# EAGLE board axiom_beta_plugin_module_1xHDMI_in_v0.1.f594beab (EAGLE 7.0.0)
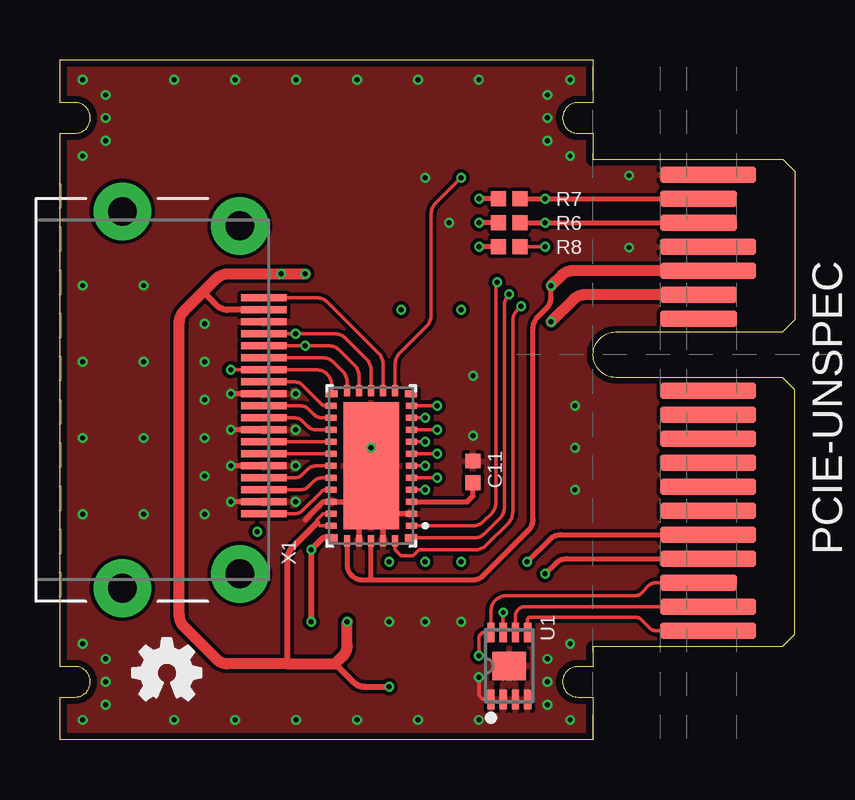
[diagram p0: board, top side]
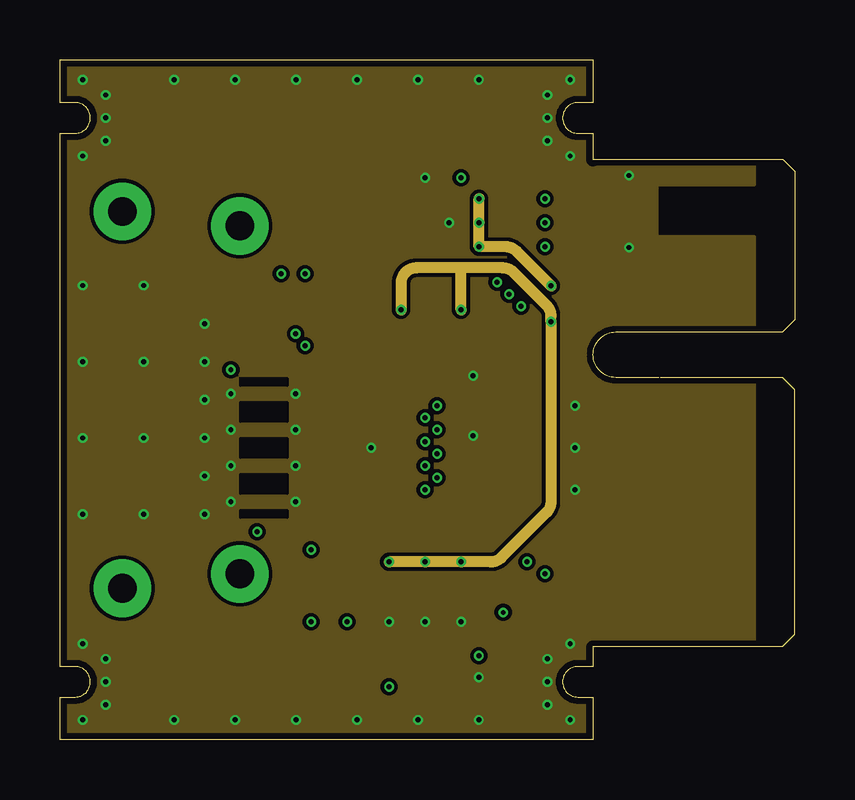
[diagram p1: board, inner layer Route2]
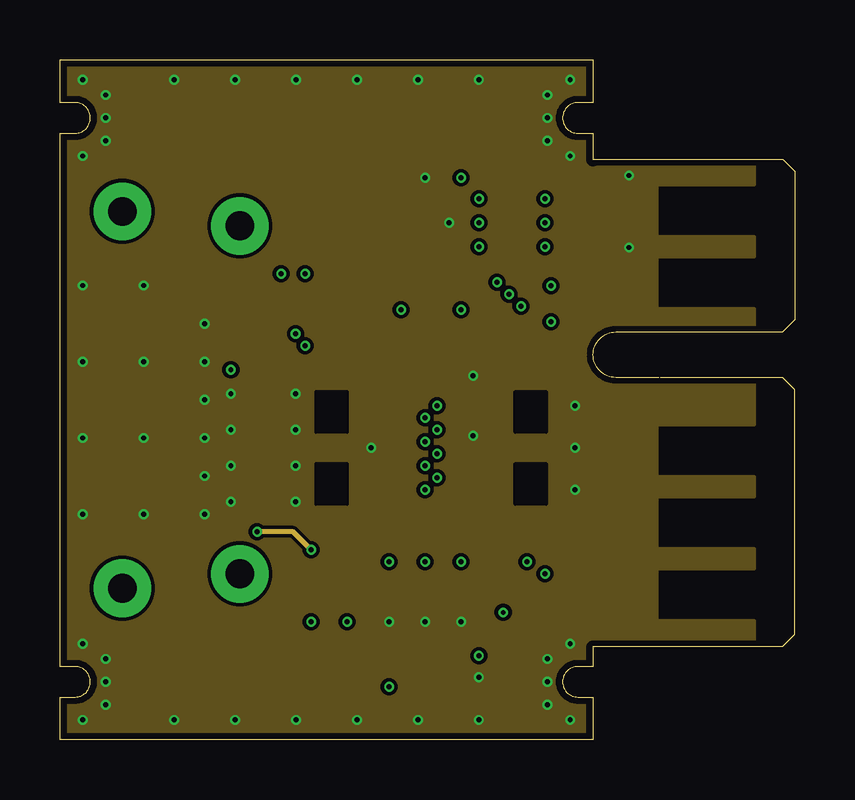
[diagram p2: board, inner layer Route15]
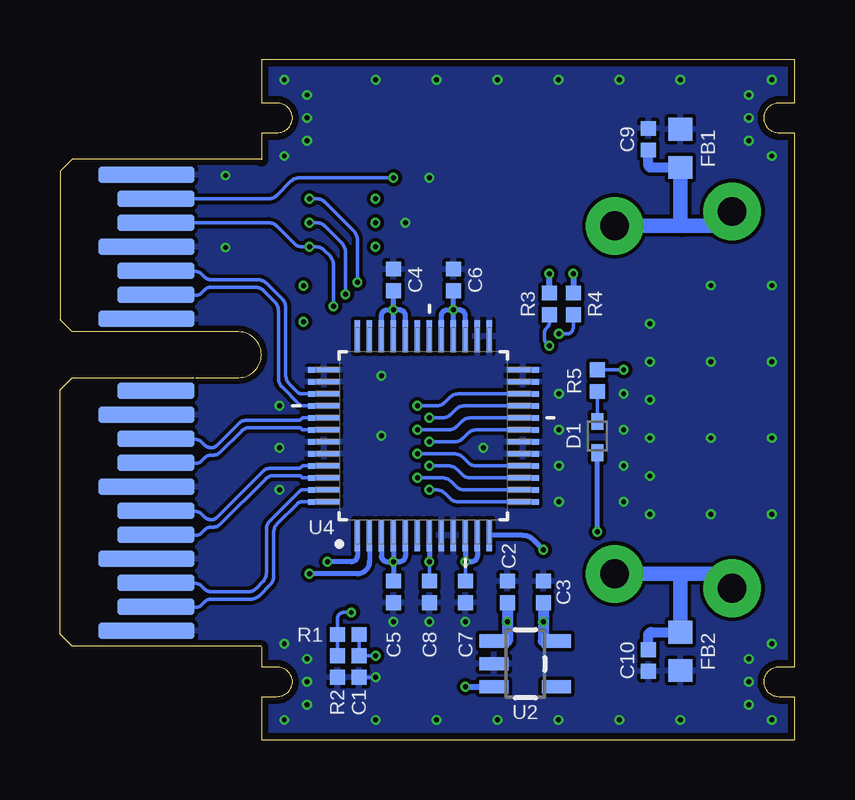
[diagram p3: board, bottom side, seen from below]

Size 30.62 x 28.32 mm. Coordinates in mm from the lower left corner, seen from the top.
Outline: 22.23,24.16 22.23,25.27 21.59,25.27 arc-90 20.96,25.91 arc-90 21.59,26.54 22.23,26.54 22.23,28.32 0,28.32 0,26.54 0.64,26.54 arc-90 1.27,25.91 arc-90 0.64,25.27 0,25.27 0,3.05 0.64,3.05 arc-90 1.27,2.41 arc-90 0.64,1.78 0,1.78 0,0 22.23,0 22.23,1.78 21.59,1.78 arc-90 20.96,2.41 arc-90 21.59,3.05 22.23,3.05 22.23,3.86
Copper layers (1*2*15*16): Top 0.035559375mm / dielectric 0.17018125mm / Route2 0.01778125mm / dielectric 47mil / Route15 0.01778125mm / dielectric 0.17018125mm / Bottom 0.035559375mm
Design rules "OSHPark-4layer-tuned *": minimum track width 5mil, minimum drill 8mil, track to track 6mil, track to pad 5mil, pad to pad 5mil, via to via 5mil, smd to smd 5mil, copper to edge 10mil, drill to drill 6mil, minimum pad ring 4mil, minimum via ring 4mil, stop-mask expansion 2mil, vias tented up to drill 15mil, thermal gap 6mil
Net classes: 0 default: width 0.152 mm, drill 0.203 mm; 1 power: width 0.152 mm, drill 0.203 mm
tKeepout: area -1,24.3 to 2.2,27.5; area -1,0.8 to 2.2,4; area 20,0.8 to 23.2,4; area 20,24.3 to 23.2,27.5
bKeepout: area -1,24.3 to 2.2,27.5; area -1,0.8 to 2.2,4; area 20,0.8 to 23.2,4; area 20,24.3 to 23.2,27.5

## Footprints (pad centres in the part's own frame; a part is rotated, then mirrored left to right if it is on the bottom)
0402-B = smd 0.62 x 0.62: 1 -0.45,0; 2 0.45,0
SOD523 = smd 0.7 x 0.5: A 0.7,0; C -0.6,0
0603-B = smd 0.95 x 1: 1 -0.8,0; 2 0.8,0
PCIE-36-AXIOM = smd 0.7 x 4 bottom: A1 -11.5,3.6; A4 -8.5,3.6; A7 -5.5,3.6; A10 -2.5,3.6; A12 1.5,3.6; A15 4.5,3.6; A18 7.5,3.6 | smd 0.7 x 3.2 bottom: A2 -10.5,4; A3 -9.5,4; A5 -7.5,4; A6 -6.5,4; A8 -4.5,4; A9 -3.5,4; A11 -1.5,4; A13 2.5,4; A14 3.5,4; A16 5.5,4; A17 6.5,4 | smd 0.7 x 4: B1 -11.5,3.6; B2 -10.5,3.6; B4 -8.5,3.6; B5 -7.5,3.6; B6 -6.5,3.6; B7 -5.5,3.6; B8 -4.5,3.6; B9 -3.5,3.6; B10 -2.5,3.6; B11 -1.5,3.6; B14 3.5,3.6; B15 4.5,3.6; B18 7.5,3.6 | smd 0.7 x 3.2: B3 -9.5,4; B12 1.5,4; B13 2.5,4; B16 5.5,4; B17 6.5,4
DFN200X300X100-9N = smd 0.813 x 0.305: 1 -1.397,0.762; 2 -1.397,0.254; 3 -1.397,-0.254; 4 -1.397,-0.762; 5 1.397,-0.762; 6 1.397,-0.254; 7 1.397,0.254; 8 1.397,0.762 | smd 1.194 x 1.397: EP 0,0
SOT23-5 = smd 0.55 x 1.2: 1 -0.95,-1.3; 2 0,-1.3; 3 0.95,-1.3; 4 0.95,1.3; 5 -0.95,1.3
QFN50P650L90W-25N = smd 0.25 x 0.45: 1 -2.5,-1.675; 2 -2,-1.675; 3 -1.5,-1.675; 4 -1,-1.675; 5 -0.5,-1.675; 6 0,-1.675; 7 0.5,-1.675; 8 1,-1.675; 9 1.5,-1.675; 10 2,-1.675; 11 2.5,-1.675; 19 2.5,1.675; 20 2,1.675; 21 1.5,1.675; 22 1,1.675; 23 0.5,1.675; 24 0,1.675; 25 -0.5,1.675; 26 -1,1.675; 27 -1.5,1.675; 28 -2,1.675; 29 -2.5,1.675 | smd 0.3 x 0.5: 12 3.005,-1.65; 18 3.005,1.65; 30 -3.005,1.65; 36 -3.005,-1.65 | smd 0.45 x 0.25: 13 3.125,-1; 14 3.125,-0.5; 15 3.125,0; 16 3.125,0.5; 17 3.125,1; 31 -3.125,1; 32 -3.125,0.5; 33 -3.125,0; 34 -3.125,-0.5; 35 -3.125,-1 | smd 5.3 x 2.3: EP 0,0
QFP50P900X900X160-48N = smd 1.321 x 0.229: 1 -4.15,2.75; 2 -4.15,2.25; 3 -4.15,1.75; 4 -4.15,1.25; 5 -4.15,0.75; 6 -4.15,0.25; 7 -4.15,-0.25; 8 -4.15,-0.75; 9 -4.15,-1.25; 10 -4.15,-1.75; 11 -4.15,-2.25; 12 -4.15,-2.75; 25 4.15,-2.75; 26 4.15,-2.25; 27 4.15,-1.75; 28 4.15,-1.25; 29 4.15,-0.75; 30 4.15,-0.25; 31 4.15,0.25; 32 4.15,0.75; 33 4.15,1.25; 34 4.15,1.75; 35 4.15,2.25; 36 4.15,2.75 | smd 0.229 x 1.321: 13 -2.75,-4.15; 14 -2.25,-4.15; 15 -1.75,-4.15; 16 -1.25,-4.15; 17 -0.75,-4.15; 18 -0.25,-4.15; 19 0.25,-4.15; 20 0.75,-4.15; 21 1.25,-4.15; 22 1.75,-4.15; 23 2.25,-4.15; 24 2.75,-4.15; 37 2.75,4.15; 38 2.25,4.15; 39 1.75,4.15; 40 1.25,4.15; 41 0.75,4.15; 42 0.25,4.15; 43 -0.25,4.15; 44 -0.75,4.15; 45 -1.25,4.15; 46 -1.75,4.15; 47 -2.25,4.15; 48 -2.75,4.15
10029449-X01XLF = smd 0.3 x 1.9: 1 4.75,8.5; 2 4.25,8.5; 3 3.75,8.5; 4 3.25,8.5; 5 2.75,8.5; 6 2.25,8.5; 7 1.75,8.5; 8 1.25,8.5; 9 0.75,8.5; 10 0.25,8.5; 11 -0.25,8.5; 12 -0.75,8.5; 13 -1.25,8.5; 14 -1.75,8.5; 15 -2.25,8.5; 16 -2.75,8.5; 17 -3.25,8.5; 18 -3.75,8.5; 19 -4.25,8.5 | drill 1.2 pad 2.4: Z1 -7.25,7.5; Z2 -7.85,2.6; Z3 7.85,2.6; Z4 7.25,7.5

## Placement (x,y rotation side)
C1  100n  [0402-B]  18.16,3.05 270 bottom
C2  1u  [0402-B]  11.98,6.16 90 bottom
C3  1u  [0402-B]  10.48,6.16 90 bottom
C4  100n  [0402-B]  16.73,19.16 90 bottom
C5  100n  [0402-B]  16.73,6.16 270 bottom
C6  10n  [0402-B]  14.23,19.16 90 bottom
C7  10n  [0402-B]  13.73,6.16 270 bottom
C8  10n  [0402-B]  15.23,6.16 270 bottom
C9  10n  [0402-B]  6.1,25.02 90 bottom
C10  10n  [0402-B]  6.1,3.3 270 bottom
C11  10n  [0402-B]  17.23,11.16 90 top
D1  [SOD523]  8.23,12.66 270 bottom
FB1  [0603-B]  4.76,24.64 90 bottom
FB2  [0603-B]  4.76,3.68 270 bottom
LOGO2  OSHW_LOGO_FILLX0100-NT  [OSHW_FILLX100_NOTEXT]  3.04,1.66 0 top
PCIE-UNSPEC  PCIE-36-AXIOM  [PCIE-36-AXIOM]  30.62,16.04 90 top  (not fitted)
R1  10k  [0402-B]  18.61,4.38 180 bottom
R2  1k  [0402-B]  19.05,3.05 270 bottom
R3  [0402-B]  10.23,18.16 270 bottom
R4  [0402-B]  9.23,18.16 270 bottom
R5  [0402-B]  8.23,14.96 90 bottom
R6  [0402-B]  18.73,21.54 0 top
R7  [0402-B]  18.73,22.54 0 top
R8  [0402-B]  18.73,20.54 0 top
U1  BR24G04NUX  [DFN200X300X100-9N]  18.73,3.08 90 top
U2  AP7331-FIXEDSOT23-5  [SOT23-5]  11.23,3.16 270 bottom
U3  HDMI2C2-14HD  [QFN50P650L90W-25N]  12.98,11.41 90 top
U4  DS90LV004  [QFP50P900X900X160-48N]  15.48,12.66 90 bottom
U$  AXIOM_LOGO459X70  [AXIOM_LOGO_459X70]  4.13,24.96 0 top
X1  HDMI-10029449  [10029449-X01XLF]  0,14.16 270 top

## Library data of the parts
C1-C11 FB1 FB2 R1-R8 = generic-rcl
D1 = diode
LOGO2 = ohw-logo
PCIE-UNSPEC = PCIe
U1 = eeprom
U2 = ldo
U3 = hdmi2c2-14hd
U4 = ds90lv004
U$ = logos_apertus_axiom
X1 = hdmi

## Nets
3V3: C4.1 C5.1 C6.1 C7.1 C8.1 PCIE-UNSPEC.B13 U4.3 U4.4 U4.5 U4.7 U4.10 U4.11 U4.27 U4.28 U4.29 U4.32 U4.33 U4.34
5V_IN: C2.1 R3.1 R4.1 U2.1 U2.3 U3.28 U3.29 X1.18
!OE!: PCIE-UNSPEC.B10
CEC: PCIE-UNSPEC.A16 R8.2 U3.35
CK+: U3.20 X1.10
CK-: U3.19 X1.12
D0+: U3.22 X1.7
D0-: U3.21 X1.9
D1+: U3.24 X1.4
D1-: U3.23 X1.6
D2+: U3.26 X1.1
D2-: U3.25 X1.3
DDC_EN: PCIE-UNSPEC.B9
DDC_SCL: PCIE-UNSPEC.B16 R6.2 U3.36
DDC_SDA: PCIE-UNSPEC.B17 R7.2 U3.1
DDET: PCIE-UNSPEC.B7
EN: PCIE-UNSPEC.B11
EQ1: PCIE-UNSPEC.B8
GND: C1.2 C2.2 C3.2 C4.2 C5.2 C6.2 C7.2 C8.2 C9.2 C10.2 C11.2 FB1.2 FB2.2 PCIE-UNSPEC.A1 PCIE-UNSPEC.A4 PCIE-UNSPEC.A7 PCIE-UNSPEC.A10 PCIE-UNSPEC.A12 PCIE-UNSPEC.A15 PCIE-UNSPEC.A18 PCIE-UNSPEC.B15 PCIE-UNSPEC.B18 R2.2 U1.1 U1.2 U1.3 U1.4 U1.EP U2.2 U3.2 U3.27 U3.32 U3.34 U3.EP U4.8 U4.9 U4.17 U4.18 U4.23 U4.24 U4.25 U4.26 U4.37 U4.38 U4.43 U4.44 X1.2 X1.5 X1.8 X1.11 X1.17
HEAC+: U3.12
HPD: PCIE-UNSPEC.A17 U3.13
I2C_V: C1.1 PCIE-UNSPEC.B3 R1.1 U1.8
IHP: PCIE-UNSPEC.B6
IN0+: U3.4 U4.13
IN0-: U3.5 U4.14
IN1+: U3.6 U4.15
IN1-: U3.7 U4.16
IN2+: U3.8 U4.19
IN2-: U3.9 U4.20
IN3+: U3.10 U4.21
IN3-: U3.11 U4.22
LVDS_0_N: PCIE-UNSPEC.A3 U4.47
LVDS_0_P: PCIE-UNSPEC.A2 U4.48
LVDS_1_N [power]: PCIE-UNSPEC.A6 U4.45
LVDS_1_P [power]: PCIE-UNSPEC.A5 U4.46
LVDS_2_N [power]: PCIE-UNSPEC.A9 U4.41
LVDS_2_P [power]: PCIE-UNSPEC.A8 U4.42
LVDS_3_N [power]: PCIE-UNSPEC.A14 U4.39
LVDS_3_P [power]: PCIE-UNSPEC.A13 U4.40
N$1: R3.2 U3.16 X1.15
N$2: R4.2 U3.15 X1.16
N$3: R5.2 U3.18 X1.13
N$4: U3.17 X1.14
N$5: U3.14 X1.19
N$6: C9.1 FB1.1 X1.Z1 X1.Z2
N$12: R1.2 R2.1 U1.7
N$15: C10.1 FB2.1 X1.Z3 X1.Z4
N$17: D1.C R5.1
N$19: C11.1 U3.3
N$209: PCIE-UNSPEC.A11
PCIE_5V: PCIE-UNSPEC.B12
PEM0: PCIE-UNSPEC.B5 U4.1
PEM1: PCIE-UNSPEC.B4 U4.2
SCL: PCIE-UNSPEC.B2 U1.6
SDA: PCIE-UNSPEC.B1 U1.5
VDD_CEC: C3.1 D1.A U2.5 U3.30 U4.12
VDD_IC: PCIE-UNSPEC.B14 R6.1 R7.1 R8.1 U3.31 U3.33

## Tracks (layer width: path | path; a pad name or v marks a point on that pad's centre or on a via)
3V3  (via drill 0.2)
  Top 0.457: PCIE-UNSPEC.B13 21.87,18.54 arc45 21.42,18.35 v20.48,17.41
  Route2 0.457: 16.73,19.66 18.46,19.66 arc-45 18.91,19.47 20.29,18.1 arc-45 20.48,17.65 v20.48,17.41 20.48,9.92 arc-45 20.29,9.47 18.41,7.6 arc-45 17.96,7.41 v16.73,7.41 v15.23,7.41 v13.73,7.41 | 16.73,19.66 14.86,19.66 arc90 14.23,19.03 v14.23,17.91 | v16.73,17.91 16.73,19.66
  Bottom 0.152: C7.1 v13.73,7.41 | C8.1 v15.23,7.41
  Bottom 0.203: U4.11 13.23,7.66 arc90 13.48,7.41 v13.73,7.41 U4.10 | U4.5 16.23,7.66 arc90 16.48,7.41 v16.73,7.41 | U4.3 17.23,7.66 arc-90 16.97,7.41 v16.73,7.41 | U4.7 v15.23,7.41 | U4.4 v16.73,7.41 | U4.34 17.23,17.66 arc90 16.97,17.91 v16.73,17.91 | U4.32 16.23,17.66 arc-90 16.48,17.91 v16.73,17.91 | U4.27 13.73,17.66 arc-90 13.98,17.91 v14.23,17.91 | U4.28 v14.23,17.91 | U4.29 14.73,17.66 arc90 14.47,17.91 v14.23,17.91 | U4.33 v16.73,17.91 | v16.73,7.41 C5.1 | v14.23,17.91 C6.1 | v16.73,17.91 C4.1
5V_IN  (via drill 0.2)
  Top 0.152: U3.28 10.98,9.41 10.73,9.16 10.73,9.04 10.85,8.91 U3.29
  Top 0.254: 10.73,9.04 9.66,7.97 arc45 9.48,7.52 9.48,3.16 | 11.48,3.16 12.24,2.4 arc45 12.69,2.21 v13.73,2.21 | X1.18 6.99,17.91 arc-45 6.54,18.1 5.98,18.66
  Top 0.457: v11.98,4.91 11.98,3.92 arc-45 11.79,3.47 11.48,3.16 9.48,3.16 6.99,3.16 arc-45 6.54,3.35 5.16,4.72 arc-45 4.98,5.17 4.98,17.4 arc-45 5.16,17.85 5.98,18.66 6.54,19.22 arc-45 6.99,19.41 v9.23,19.41 v10.23,19.41
  Bottom 0.254: v13.73,2.21 U2.3 | R3.1 v10.23,19.41 | v9.23,19.41 R4.1
  Bottom 0.457: C2.1 v11.98,4.91 11.98,4.11 U2.1
CEC  (via drill 0.2)
  Top 0.152: U3.35 13.98,7.91 14.23,7.66 14.73,7.66 14.98,7.91 17.31,7.91 arc45 17.76,8.1 18.69,9.02 arc45 18.88,9.47 18.88,17.45 arc-45 19.06,17.9 v19.23,18.06 | R8.2 v20.23,20.54
  Bottom 0.152: v19.23,18.06 19.23,19.8 arc-45 19.37,20.16 19.61,20.39 arc-45 19.97,20.54 v20.23,20.54 20.52,20.54 arc45 20.87,20.69 21.58,21.39 arc-45 21.94,21.54 PCIE-UNSPEC.A16
CK+
  Top 0.152: X1.10 10.02,13.91 arc-45 10.37,13.76 10.58,13.56 arc45 10.94,13.41 U3.20
CK-
  Top 0.152: X1.12 9.77,14.91 arc-45 10.12,14.76 10.9,13.98 arc45 11.08,13.91 U3.19
D0+
  Top 0.152: X1.7 U3.22
D0-
  Top 0.152: X1.9 9.77,13.41 arc-45 10.12,13.26 10.33,13.06 arc45 10.69,12.91 U3.21
D1+
  Top 0.152: X1.4 9.77,10.91 arc45 10.12,11.06 10.33,11.26 arc-45 10.69,11.41 U3.24
D1-
  Top 0.152: X1.6 U3.23
D2+
  Top 0.152: X1.1 9.77,9.41 arc45 10.12,9.56 10.9,10.34 arc-45 11.08,10.41 U3.26
D2-
  Top 0.152: X1.3 10.02,10.41 arc45 10.37,10.56 10.58,10.76 arc-45 10.94,10.91 U3.25
DDC_SCL  (via drill 0.2)
  Top 0.152: U3.36 17.26,8.41 arc45 17.71,8.59 18.34,9.22 arc45 18.53,9.67 18.53,18.1 arc-45 18.71,18.55 v18.73,18.56
  Top 0.203: R6.2 v20.23,21.54 PCIE-UNSPEC.B16
  Bottom 0.152: v18.73,18.56 18.73,20.33 arc-45 18.87,20.69 19.58,21.39 arc-45 19.94,21.54 v20.23,21.54
DDC_SDA  (via drill 0.2)
  Top 0.152: U3.1 17.21,8.91 arc45 17.66,9.1 17.99,9.42 arc45 18.18,9.87 18.18,18.94 arc-45 v18.23,19.06
  Top 0.203: R7.2 v20.23,22.54 PCIE-UNSPEC.B17
  Bottom 0.152: v18.23,19.06 18.23,20.83 arc-45 18.37,21.19 19.58,22.39 arc-45 19.94,22.54 v20.23,22.54
GND  (via drill 0.2)
  Top 0.152: U1.1 17.72,1.68 arc-90 17.46,1.93 v17.46,2.6
  Top 0.203: X1.2 v7.13,9.91 | X1.5 v7.13,11.41 | X1.8 v7.13,12.91 | X1.11 v7.13,14.41 | 10.23,9.16 10.98,9.91 U3.27 12.48,9.91 U3.32 | U3.2 13.48,9.41 U3.34
  Bottom 0.152: v17.46,2.6 C1.2
  other vias: 0.95,27.5 21.27,27.5 21.27,0.83 0.95,0.83 4.76,27.5 17.46,27.5 4.76,0.83 0.95,4 0.95,24.32 1.91,24.96 21.27,24.32 17.46,0.83 21.27,4 7.3,27.5 9.84,27.5 12.38,27.5 0.95,12.57 0.95,15.75 0.95,18.92 0.95,9.4 1.91,26.86 20.32,24.96 20.32,26.86 1.91,1.46 1.91,3.37 20.32,3.37 20.32,1.46 9.84,0.83 12.38,0.83 7.3,0.83 14.92,0.83 20.32,25.91 1.91,25.91 1.91,2.41 20.32,2.41 3.49,18.92 3.49,15.75 3.49,12.57 3.49,9.4 6.03,15.75 6.03,12.57 6.03,9.4 6.03,14.16 6.03,10.99 6.03,17.34 23.73,23.51 23.73,20.51 14.92,27.5 17.23,15.16 17.23,12.66 9.83,14.41 9.83,12.91 9.83,11.41 9.83,9.91 12.98,12.16 21.48,10.41 21.48,12.16 21.48,13.91 13.73,4.91 15.23,4.91 16.73,4.91 15.23,23.41 16.23,21.54
  pour Bottom (isolate 0.127): 0,28.45 22.23,28.45 22.23,24.32 25.4,24.32 25.4,3.75 22.23,3.75 22.23,-0.13 0,-0.13
  pour Top (isolate 0.127): 0,28.45 22.23,28.45 22.23,24.32 25.4,24.32 25.4,3.75 22.23,3.75 22.23,-0.13 0,-0.13
  pour Route2 (isolate 0.127, rank 3): 0,28.45 22.23,28.45 22.23,24.32 28.96,24.32 28.96,23.12 24.89,23.12 24.89,20.96 28.96,20.96 28.96,3.75 22.23,3.75 22.23,-0.13 0,-0.13
  pour Route15 (isolate 0.127, rank 3): 0,28.45 22.23,28.45 22.23,24.32 28.96,24.32 28.96,23.12 24.89,23.12 24.89,20.96 28.96,20.96 28.96,20.12 24.89,20.12 24.89,17.96 28.96,17.96 28.96,13.12 24.89,13.12 24.89,10.96 28.96,10.96 28.96,10.12 24.89,10.12 24.89,7.96 28.96,7.96 28.96,7.12 24.89,7.12 24.89,4.96 28.96,4.96 28.96,3.75 22.23,3.75 22.23,-0.13 0,-0.13
  cutout Route2: 9.48,9.26 7.53,9.26 7.53,9.56 9.48,9.56
  cutout Route2: 9.48,14.76 7.53,14.76 7.53,15.06 9.48,15.06
  cutout Route2: 9.48,13.26 7.53,13.26 7.53,14.06 9.48,14.06
  cutout Route2: 9.48,11.76 7.53,11.76 7.53,12.56 9.48,12.56
  cutout Route2: 9.48,10.26 7.53,10.26 7.53,11.06 9.48,11.06
  cutout Route15: 11.98,12.81 10.68,12.81 10.68,14.51 11.98,14.51
  cutout Route15: 11.98,9.81 10.68,9.81 10.68,11.51 11.98,11.51
  cutout Route15: 20.28,12.81 18.98,12.81 18.98,14.51 20.28,14.51
  cutout Route15: 20.28,9.81 18.98,9.81 18.98,11.51 20.28,11.51
HPD  (via drill 0.2)
  Top 0.152: U3.13 13.98,15.65 arc-45 14.16,16.1 15.29,17.22 arc45 15.48,17.67 15.48,21.9 arc-45 15.66,22.35 v16.73,23.41
  Bottom 0.152: v16.73,23.41 20.64,23.41 arc-45 21,23.26 21.58,22.69 arc45 21.94,22.54 PCIE-UNSPEC.A17
I2C_V  (via drill 0.2)
  Top 0.152: v17.46,3.5 17.46,4.22 arc-90 17.72,4.48 U1.8 17.97,5.36 arc-90 18.61,6 23.97,6 arc45 24.24,6.11 24.56,6.43 arc-45 24.83,6.54 PCIE-UNSPEC.B3
  Bottom 0.152: v17.46,3.5 C1.1 R1.1
IN0+  (via drill 0.2)
  Top 0.152: v15.23,10.41 U3.4
  Bottom 0.152: U4.13 14.02,9.91 arc45 14.37,10.06 14.58,10.26 arc-45 14.94,10.41 v15.23,10.41 14.98,10.41
IN0-  (via drill 0.2)
  Top 0.152: v15.73,10.91 U3.5
  Bottom 0.152: U4.14 13.77,10.41 arc45 14.12,10.56 14.33,10.76 arc-45 14.69,10.91 14.98,10.91 15.23,10.91 v15.73,10.91
IN1+  (via drill 0.2)
  Top 0.152: v15.23,11.41 U3.6
  Bottom 0.152: U4.15 13.52,10.91 arc45 13.87,11.06 14.08,11.26 arc-45 14.44,11.41 v15.23,11.41
IN1-  (via drill 0.2)
  Top 0.152: v15.73,11.91 U3.7
  Bottom 0.152: U4.16 13.27,11.41 arc45 13.62,11.56 13.83,11.76 arc-45 14.19,11.91 v15.73,11.91
IN2+  (via drill 0.2)
  Top 0.152: v15.23,12.41 U3.8
  Bottom 0.152: U4.19 13.27,12.91 arc-45 13.62,12.76 13.83,12.56 arc45 14.19,12.41 v15.23,12.41
IN2-  (via drill 0.2)
  Top 0.152: v15.73,12.91 U3.9
  Bottom 0.152: U4.20 13.52,13.41 arc-45 13.87,13.26 14.08,13.06 arc45 14.44,12.91 v15.73,12.91
IN3+  (via drill 0.2)
  Top 0.152: v15.23,13.41 U3.10
  Bottom 0.152: U4.21 13.77,13.91 arc-45 14.12,13.76 14.33,13.56 arc45 14.69,13.41 v15.23,13.41
IN3-  (via drill 0.2)
  Top 0.152: v15.73,13.91 U3.11
  Bottom 0.152: U4.22 14.02,14.41 arc-45 14.37,14.26 14.58,14.06 arc45 14.94,13.91 15.15,13.91 15.23,13.91 v15.73,13.91
LVDS_0_N
  Bottom 0.152: PCIE-UNSPEC.A3 24.98,6.51 arc45 24.71,6.4 24.59,6.27 arc-45 24.32,6.16 22.79,6.16 arc-45 22.43,6.31 22.17,6.57 arc-45 22.02,6.93 22.02,8.76 arc45 21.87,9.12 20.66,10.34 arc45 20.48,10.41 U4.47
LVDS_0_P
  Bottom 0.152: PCIE-UNSPEC.A2 24.98,5.51 arc-45 24.71,5.62 24.59,5.75 arc45 24.32,5.86 22.67,5.86 arc-45 22.31,6.01 21.86,6.45 arc-45 21.71,6.81 21.71,8.64 arc45 21.57,9 20.73,9.84 arc45 20.55,9.91 U4.48
LVDS_1_N
  Bottom 0.152: PCIE-UNSPEC.A6 24.98,9.51 arc45 24.71,9.4 24.59,9.27 arc-45 24.32,9.16 24.32,9.16 arc-45 24.1,9.25 22.19,11.16 arc45 21.83,11.31 20.67,11.31 arc-45 20.58,11.35 20.56,11.37 arc45 20.47,11.41 U4.45
LVDS_1_P
  Bottom 0.152: PCIE-UNSPEC.A5 24.98,8.51 arc-45 24.71,8.62 24.59,8.75 arc45 24.32,8.86 24.22,8.86 arc-45 23.95,8.97 22.06,10.86 arc45 21.7,11.01 20.67,11.01 arc45 20.58,10.97 20.56,10.95 arc-45 20.47,10.91 U4.46
LVDS_2_N
  Bottom 0.152: PCIE-UNSPEC.A9 24.98,12.51 arc45 24.71,12.4 24.59,12.27 arc-45 24.32,12.16 arc-45 24.1,12.25 23.19,13.16 arc45 22.83,13.31 20.67,13.31 arc-45 20.58,13.35 20.56,13.37 arc45 20.47,13.41 U4.41
LVDS_2_P
  Bottom 0.152: PCIE-UNSPEC.A8 24.98,11.51 arc-45 24.71,11.62 24.59,11.75 arc45 24.32,11.86 24.22,11.86 arc-45 23.95,11.97 23.06,12.86 arc45 22.7,13.01 20.67,13.01 arc45 20.58,12.97 20.56,12.95 arc-45 20.47,12.91 U4.42
LVDS_3_N
  Bottom 0.152: PCIE-UNSPEC.A14 24.98,19.51 arc45 24.71,19.4 24.59,19.27 arc-45 24.32,19.16 22.36,19.16 arc45 22.01,19.01 21.36,18.37 arc45 21.21,18.01 21.21,15.18 arc-45 21.07,14.82 20.73,14.48 arc-45 20.55,14.41 U4.39
LVDS_3_P
  Bottom 0.152: PCIE-UNSPEC.A13 24.98,18.51 arc-45 24.71,18.62 24.59,18.75 arc45 24.32,18.86 22.49,18.86 arc45 22.13,18.71 21.67,18.25 arc45 21.52,17.89 21.52,15.06 arc-45 21.37,14.7 20.66,13.98 arc-45 20.48,13.91 U4.40
N$1  (via drill 0.2)
  Top 0.152: X1.15 v10.23,16.41 11.21,16.41 arc-45 11.66,16.22 12.29,15.6 arc-45 12.48,15.15 U3.16
  Bottom 0.152: R3.2 10.23,17.37 arc45 10.3,17.19 10.35,17.13 arc-45 10.43,16.96 10.43,16.72 arc-45 10.35,16.54 v10.23,16.41
N$2  (via drill 0.2)
  Top 0.152: X1.16 v9.83,16.91 11.46,16.91 arc-45 11.91,16.72 12.79,15.85 arc-45 12.98,15.4 U3.15
  Bottom 0.152: R4.2 9.23,17.16 arc90 9.48,16.91 v9.83,16.91
N$3  (via drill 0.2)
  Top 0.152: U3.18 11.33,14.78 arc90 10.69,15.41 X1.13 v7.13,15.41
  Bottom 0.152: v7.13,15.41 R5.2
N$4
  Top 0.152: X1.14 10.96,15.91 arc-45 11.41,15.72 11.79,15.35 arc-45 11.98,14.9 U3.17
N$5
  Top 0.152: X1.19 10.71,18.41 arc-45 11.16,18.22 13.29,16.1 arc-45 13.48,15.65 U3.14
N$6
  Bottom 0.406: FB1.1 5.97,23.84 arc90 6.1,23.97 C9.1
  Bottom 0.61: X1.Z2 3.05,21.56 arc45 3.41,21.41 4.64,21.41 | 4.64,21.41 X1.Z1 | FB1.1 4.76,21.54 arc-90 4.64,21.41
N$12  (via drill 0.2)
  Top 0.152: U1.7 v18.48,5.3
  Bottom 0.152: R2.1 R1.2 19.05,5.05 arc90 18.8,5.3 v18.48,5.3
N$15
  Bottom 0.406: 6.03,6.91 5.08,6.91 | C10.1 6.1,4.36 arc90 5.97,4.48 FB2.1
  Bottom 0.61: X1.Z3 3.05,6.76 arc-45 3.41,6.91 4.76,6.91 | 4.76,6.91 5.08,6.91 X1.Z4 | 4.76,6.91 FB2.1 4.76,4.51
N$17
  Bottom 0.152: R5.1 D1.C
N$19
  Top 0.203: U3.3 16.98,9.91 17.23,10.16 C11.1
PEM0  (via drill 0.2)
  Top 0.203: v19.48,7.41 20.42,8.35 arc-45 20.87,8.54 PCIE-UNSPEC.B5
  Bottom 0.203: U4.1 18.23,7.66 arc90 18.48,7.41 v19.48,7.41
PEM1  (via drill 0.2)
  Top 0.203: v20.23,6.91 20.67,7.35 arc-45 21.12,7.54 PCIE-UNSPEC.B4
  Bottom 0.203: U4.2 17.73,7.42 arc90 18.23,6.91 v20.23,6.91
SCL
  Top 0.152: U1.6 18.99,5.16 arc-90 19.37,5.54 PCIE-UNSPEC.B2
SDA
  Top 0.152: U1.5 19.49,4.98 arc-90 19.62,5.11 23.97,5.11 arc-45 24.24,5 24.59,4.65 arc45 24.86,4.54 PCIE-UNSPEC.B1
VDD_CEC  (via drill 0.2)
  Top 0.254: U3.30 10.97,8.41 v10.48,7.91 v10.48,4.91
  Route15 0.203: v10.48,7.91 9.73,8.66 v8.23,8.66
  Bottom 0.203: v10.48,7.91 10.89,8.32 arc-45 11.34,8.51 U4.12 | v8.23,8.66 D1.A
  Bottom 0.457: C3.1 v10.48,4.91 10.48,4.11 U2.5
VDD_IC  (via drill 0.2)
  Top 0.203: U3.31 11.98,7.3 arc90 12.61,6.66 12.98,6.66 | 12.98,6.66 U3.33 | 12.98,6.66 17.21,6.66 arc45 17.66,6.85 19.54,8.72 arc45 19.73,9.17 19.73,17.15 arc-45 19.91,17.6 20.29,17.97 arc45 20.48,18.42 v20.48,18.91 | R7.1 v17.48,22.54 | R6.1 v17.48,21.54 | R8.1 v17.48,20.54
  Top 0.457: PCIE-UNSPEC.B14 21.37,19.54 arc45 20.92,19.35 v20.48,18.91
  Route2 0.457: v20.48,18.91 19.03,20.35 arc45 18.58,20.54 v17.48,20.54 v17.48,21.54 v17.48,22.54

## Text on the board
Measures: X1 | U1
tDocu: HIGH SPEED IO
_tSilk: 1x HDMI IN Module | V0.1 / R1.0 | (C) 2016 H.Pötzl / Licensed under / CERN OHL v.1.2
tEngrave: AXIOM BETA SPM 1xHDMI IN / TOP SIDE V0.1 R1.0
bEngrave: AXIOM BETA SPM 1xHDMI IN / BOTTOM SIDE V0.1 R1.0